# Altium PCB STM32RCT6_PCB.PcbDoc
Units mil, origin at the board's own origin, x right, y up, seen from the top; angles counter-clockwise.
Board outline 3159.64 x 2372.23 mil, 2 copper layers (Top Layer, Bottom Layer); 72 components, 72 nets, 327 pads, 137 vias.
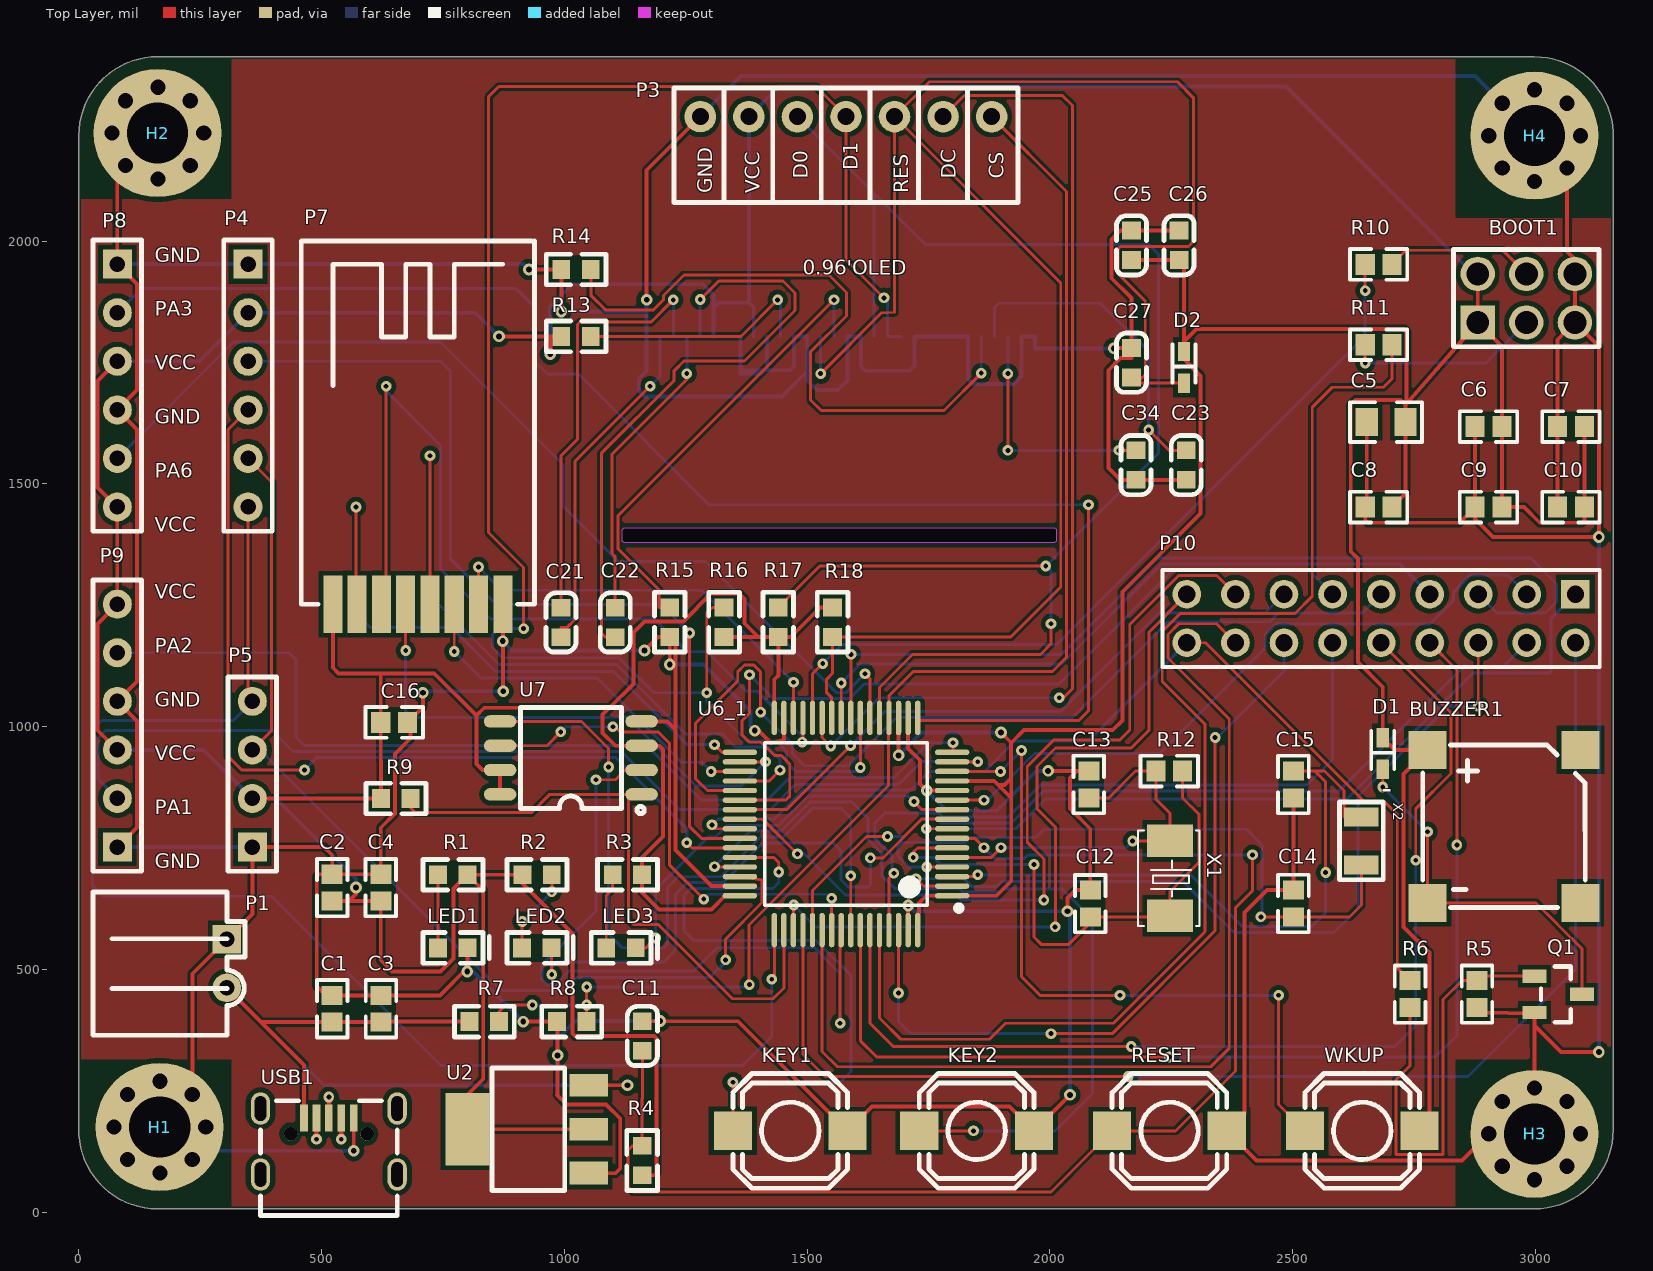
[diagram p0: Top Layer view]
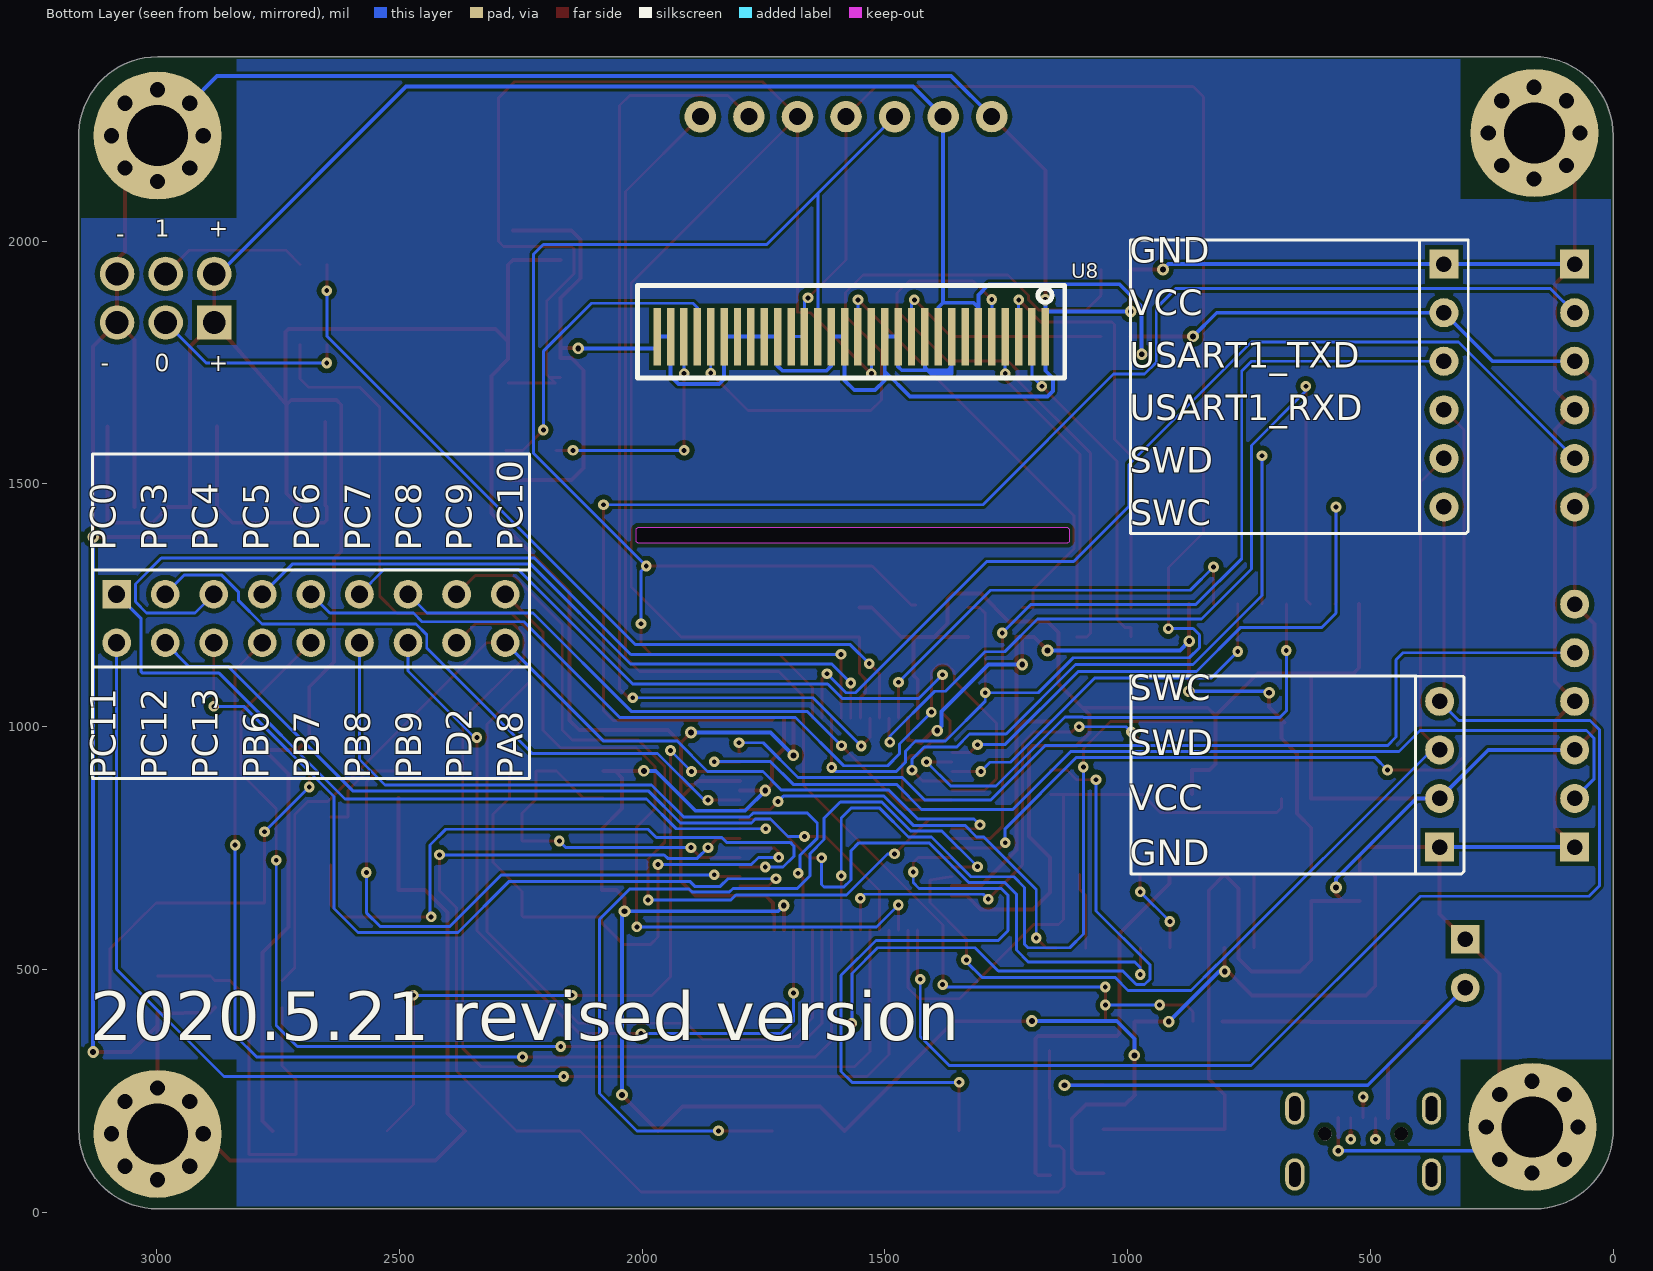
[diagram p1: Bottom Layer view, seen from below]

## Layer stack, top to bottom
Top Solder: solder mask 0.4, Solder Resist, Dk 3.5
Top Layer: signal copper 1.4
Dielectric 1: dielectric 12.6, FR-4, Dk 4.8
Bottom Layer: signal copper 1.4
Bottom Solder: solder mask 0.4, Solder Resist, Dk 3.5

## Board outline
0.46,160.1 cw(c5.2,161.74) 0.18,161.74 0.18,2216.83 cw(c5.2,2216.83) 0.18,2216.96 cw(c5.2,2217.09) 0.18,2217.09 cw(c162.93,2216.83) 163.19,2379.58 cw(c162.93,2216.83) 163.2,2379.58 2997.2,2379.58 cw(c2997.26,2217.03) 3159.69,2223.49 cw(c3154.8,2222.36) 3159.82,2222.36 3159.82,169.78 cw(c3154.8,169.78) 3159.82,169.78 cw(c2997.29,169.87) 2997.2,7.35 cw(c2997.2,12.36) 2997.17,7.35 162.68,7.35 cw(c162.44,169.61)
cut-out: 1119.37,1382.44 1119.37,1406.06 1123.31,1410 2009.25,1410 2013.07,1406.18 2013.07,1382.44 2009.13,1378.5 1123.31,1378.5

## Design rules (kind name [scope] priority, off if disabled: settings)
Clearance Clearance_stm32rct6 [All] p1: gap=10 ignorepadtopadclearanceinfootprint=TRUE except(0: Arc-Hole Track-Hole SMDPad-Hole THPad-Hole Via-Hole Fill-Hole Poly-Hole Region-Hole Text-Hole; 6: Arc-Arc Arc-Track Arc-SMDPad Arc-THPad Arc-Via Arc-Fill Arc-Poly Arc-Region Arc-Text Track-Track Track-SMDPad Track-THPad Track-Via Track-Fill Track-Poly Track-Region Track-Text)
Clearance Clearance_1 [All] p2: gap=10 ignorepadtopadclearanceinfootprint=FALSE except(0: Arc-Hole Track-Hole SMDPad-Hole THPad-Hole Via-Hole Fill-Hole Poly-Hole Region-Hole Text-Hole; 5: Arc-Arc Arc-Track Track-Track)
Clearance [All] p3: gap=10 ignorepadtopadclearanceinfootprint=FALSE except(0: Arc-Hole Track-Hole SMDPad-Hole THPad-Hole Via-Hole Fill-Hole Poly-Hole Region-Hole Text-Hole; 5: Arc-Arc Arc-Track Track-Track)
HoleToHoleClearance [All] p1: gap=5 allowstackedmicrovias=TRUE
MinimumSolderMaskSliver [All] p1: minsoldermaskwidth=5
PolygonConnect [All] p1: connectstyle=Relief reliefconductorwidth=10 reliefentries=4 polygonreliefangle="90 Angle" airgapwidth=10
RoutingVias "pwer via" [InNetClass('pwer')] p1: holewidth=12 width=24 viastyle="Through Hole" minholewidth=12 minwidth=24 maxholewidth=12 maxwidth=24
RoutingVias [All] p2: holewidth=10 width=22 viastyle="Through Hole" minholewidth=10 minwidth=22 maxholewidth=10 maxwidth=22
SilkToSolderMaskClearance [IsPad] p1: minsilkscreentomaskgap=5 clearancetoexposedcopper=TRUE
SolderMaskExpansion [All] p1: expansion=4
Width pwer [InNetClass('pwer')] p1: maxlimit=8 minlimit=8 preferedwidth=8
Width [InNetClass('All Nets')] p2: maxlimit=6 minlimit=6 preferedwidth=6
27 further rules are at their usual default settings.

## Classes and differential pairs
net class pwer: GND VBAT VCC3.3

## Components (designator, comment, footprint, x,y, rotation, side; value= is the part's Value field where it differs from the comment)
BOOT1 "HDR-IDC-2.54-2X3P" A2541WV-2X3P 2980.74,1882.36 r0 top
BUZZER1 "KLJ-8540-3627" BUZ-SMD_4P-L8.5-W8.5-TL 2934.89,794.83 r0 top
C1 "47uf" 0603 522.1,419.47 r270 top
C2 "47uf" 0603 522.1,668.81 r270 top
C3 "100nF" 0603 622.58,419.47 r270 top
C4 "100nF" 0603 622.1,668.81 r270 top
C5 "10uF" 0805 2692.23,1627.3 r0 top
C6 "100nF" 0603 2902.9,1618.06 r0 top
C7 "100nF" 0603 3072.76,1618.06 r0 top
C8 "100nF" 0603 2676.59,1452.36 r0 top
C9 "100nF" 0603 2902.9,1452.36 r0 top
C10 "100nF" 0603 3072.76,1452.36 r0 top
C11 "100nF/50V" 0603_C_JX 1160.72,363.4 r270 top
C12 "22pF" 0603 2083,636 r90 top
C13 "22pF" 0603 2079.92,881.06 r90 top
C14 "10pF" 0603 2501.2,636.09 r270 top
C15 "10pF" 0603 2501.2,881.06 r90 top
C16 "104" 0603 649.65,1009.03 r180 top
C21 "1uF/50V" 0603_C_JX 993.17,1214.76 r90 top
C22 "1uF/50V" 0603_C_JX 1104.93,1214.76 r270 top
C23 "4.7uF/16V" 0603_C_JX 2280.49,1538.74 r90 top
C25 "1uF/50V" 0603_C_JX 2167.81,1991.38 r90 top
C26 "1uF/50V" 0603_C_JX 2265.7,1991.38 r90 top
C27 "4.7uF/16V" 0603_C_JX 2167.81,1749.55 r90 top
C34 "2.2uF/50V" 0603_C_JX 2177.04,1538.74 r90 top
D1 "IN4148" SOD-523_JX 2685.2,952.3 r90 top
D2 "1N4148W" SOD-523_JX 2275.7,1747.63 r90 top
H1 "Hole" "PCBCOMPONENT_1 - DUPLICATE" 166.86,175.79 r0 top
H2 "Hole" "PCBCOMPONENT_1 - DUPLICATE" 162.68,2222.36 r0 top
H3 "Hole" "PCBCOMPONENT_1 - DUPLICATE" 2997.32,161.74 r0 top
H4 "Hole" "PCBCOMPONENT_1 - DUPLICATE" 2997.32,2217.09 r0 top
KEY1 "1TS009B-2500-4300" SW-SMD_L6.0-W6.0-P6.00-LS6.6 1465.2,167.92 r0 top
KEY2 "1TS009B-2500-4300" SW-SMD_L6.0-W6.0-P6.00-LS6.6 1849.03,167.92 r0 top
LED1 "Red/LED" 0603_D_JX 770.37,544.5 r180 top
LED2 "Green/LED" 0603_D_JX 943.55,544.5 r180 top
LED3 "Blue/LED" 0603_D_JX 1116.72,544.5 r180 top
P1 "XH_2501R_2P_JX" XH_2501R_2P_JX 305.2,512.36 r90 top
P3 "0.96OLED_7P_Module_JX" 0.96OLED_7P_MODULE_JX 1579.9,2256.46 r0 top
P4 "F_2.54_1*6P_JX" M_2.54_1*6P_JX 348.78,1702.52 r270 top
P5 "M_2.54_1*4P_JX" M_2.54_1*4P_JX 357.6,902.36 r90 top
P7 "2.4G_WIRELESS_MODULE_JX" WIRELM-SMD_DL-24N-2.4G 698.39,1252.36 r0 top
P8 "F_2.54_1*6P_JX" M_2.54_1*6P_JX 79.61,1002.36 r90 top
P9 "F_2.54_1*6P_JX" M_2.54_1*6P_JX 79.61,1702.52 r270 top
P10 "Header 9X2" HDR2X9 3081.8,1273 r180 top
Q1 "S8050" SOT-23-3_L2.9-W1.3-P1.90-LS2.4-BR 3046.55,449.14 r180 top
R1 "10K/1%" 0603_R_JX 770.5,695.49 r0 top
R2 "10K/1%" 0603_R_JX 944.05,695.27 r180 top
R3 "10K/1%" 0603_R_JX 1129.84,695.49 r0 top
R4 "10K/1%" 0603_R_JX 1160.11,106.74 r90 top
R5 "10K" 0603 2879.21,449.65 r90 top
R6 "10K" 0603 2741.42,449.65 r90 top
R7 "20K/1%" 0603_R_JX 835.2,393.01 r0 top
R8 "10K/1%" 0603_R_JX 1015.58,392.79 r180 top
R9 "4.7k" 0603_R_JX 653.09,852.47 r0 top
R10 "10K" 0603 2676.59,1951.93 r0 top
R11 "10K" 0603 2676.59,1786.55 r0 top
R12 "10K" 0603 2245.48,908.61 r0 top
R13 "4.7k/1%" 0603_R_JX 1024.17,1803.81 r0 top
R14 "910k/1%" 0603_R_JX 1024.17,1941.5 r0 top
R15 "4.7k/1%" 0603_R_JX 1217.07,1215.27 r90 top
R16 "4.7k/1%" 0603_R_JX 1328.82,1215.27 r90 top
R17 "4.7k/1%" 0603_R_JX 1440.58,1215.27 r90 top
R18 "4.7k/1%" 0603_R_JX 1552.33,1215.27 r90 top
RESET "1TS009B-2500-4300" SW-SMD_L6.0-W6.0-P6.00-LS6.6 2246.01,167.92 r0 top
U2 "AMS1117-3.3" SOT-223 925.2,171.3 r180 top
U6_1 "STM32F103RCT6TR" LQFP-64_10X10X05P 1580,799.76 r180 top
U7 "W25Q16JVSSIQ" W25Q16 1013.54,935.92 r90 top
U8 "0.96-OLED-30Pin" new_OLED30P 1169.57,1803.36 r0 bottom
USB1 "MICRO 4P DIP" MINI-USB-SMD_MICRO-4P-DIP 515.2,145.99 r0 top
WKUP "1TS009B-2500-4300" SW-SMD_L6.0-W6.0-P6.00-LS6.6 2642.99,167.92 r0 top
X1 "8MHz" SMD-5032_2P 2246.85,687.74 r270 top
X2 "32.768KHz" 32.768KHZ 2641.2,764.92 r270 top

## Footprints (in the part's own frame and the unit in brackets; to place one, negate y for a bottom-side part, rotate by r counter-clockwise, add the part's x,y. Pads: shape width x height; smd on the part's side, far side on the other; paste and mask are expansions set on the pad)
0.96OLED_7P_MODULE_JX [mm]
  round 1.65 hole 0.89: 1(-7.617,-0.003) 2(-5.077,-0.008) 3(-2.537,-0.008) 4(0.003,0) 5(2.54,-0.005) 6(5.08,-0.005) 7(7.62,-0.008)
  silkscreen extent -9,-4.5 9,1.5
32.768KHZ [mm]
  rect 1x1.8 smd: 1(-1.25,0) 2(1.25,0)
  silkscreen extent -2.03,-1.14 2.03,1.14
0603 [mm]
  rect 1x1.1 smd: 1(-0.7,0) 2(0.7,0)
  silkscreen extent -1.5,-0.8 1.5,0.8
0603_C_JX [mil]
  rect 36.61x38.58 smd: 1(-30.31,-0.21) 2(30.38,-0.01)
  silkscreen extent -61,-31 61,31
0603_D_JX [mil]
  rect 36.61x38.58 smd: 1(30.38,-0.01) 2(-30.31,-0.21)
  silkscreen extent -75,-32 61,31
0603_R_JX [mil]
  rect 36.61x38.58 smd: 1(-30.31,-0.11) 2(30.38,-0.11)
  silkscreen extent -62,-32 62,31
0805 [mm]
  rect 1.16x1.45 smd: 1(-1.016,0) 2(1.016,0)
  silkscreen extent -1.9,-1.03 1.87,1.04
A2541WV-2X3P [mm]
  rect 1.8x1.8 hole 1.2: 1(-2.54,-1.27)
  round 1.8 hole 1.2: 2(-2.54,1.27) 3(0,-1.27) 4(0,1.27) 5(2.54,-1.27) 6(2.54,1.27)
  silkscreen extent -3.81,-2.54 3.81,2.54
BUZ-SMD_4P-L8.5-W8.5-TL [mm]
  rect 2x2 smd: 1(-4,4) 2(-4,-4) 3(4,-4) 4(4,4)
  silkscreen extent -4.25,-4.25 4.25,4.25
HDR2X9 [mm] "Connector; Header; 9x2 Position"
  rect 1.5x1.5 hole 0.9: 1(0,0)
  round 1.5 hole 0.9: 2(0,2.54) 3(2.54,0) 4(2.54,2.54) 5(5.08,0) 6(5.08,2.54) 7(7.62,0) 8(7.62,2.54) 9(10.16,0) 10(10.16,2.54) 11(12.7,0) 12(12.7,2.54) 13(15.24,0) 14(15.24,2.54) 15(17.78,0) 16(17.78,2.54) 17(20.32,0) 18(20.32,2.54)
  silkscreen extent -1.27,-1.27 21.59,3.81
LQFP-64_10X10X05P [mil]
  oval 70.7x11.02 smd: 1(-218.5,147.64) 2(-218.5,127.95) 3(-218.5,108.27) 4(-218.5,88.58) 5(-218.5,68.9) 6(-218.5,49.21) 7(-218.5,29.53) 8(-218.5,9.84) 9(-218.5,-9.84) 10(-218.5,-29.53) 11(-218.5,-49.21) 12(-218.5,-68.9) 13(-218.5,-88.58) 14(-218.5,-108.27) 15(-218.5,-127.95) 16(-218.5,-147.64) 33(218.5,-147.64) 34(218.5,-127.95) 35(218.5,-108.27) 36(218.5,-88.58) 37(218.5,-68.9) 38(218.5,-49.21) 39(218.5,-29.53) 40(218.5,-9.84) 41(218.5,9.84) 42(218.5,29.53) 43(218.5,49.21) 44(218.5,68.9) 45(218.5,88.58) 46(218.5,108.27) 47(218.5,127.95) 48(218.5,147.64)
  oval 11.02x70.7 smd: 17(-147.64,-218.5) 18(-127.95,-218.5) 19(-108.27,-218.5) 20(-88.58,-218.5) 21(-68.9,-218.5) 22(-49.21,-218.5) 23(-29.53,-218.5) 24(-9.84,-218.5) 25(9.84,-218.5) 26(29.53,-218.5) 27(49.21,-218.5) 28(68.9,-218.5) 29(88.58,-218.5) 30(108.27,-218.5) 31(127.95,-218.5) 32(147.64,-218.5) 49(147.64,218.5) 50(127.95,218.5) 51(108.27,218.5) 52(88.58,218.5) 53(68.9,218.5) 54(49.21,218.5) 55(29.53,218.5) 56(9.84,218.5) 57(-9.84,218.5) 58(-29.53,218.5) 59(-49.21,218.5) 60(-68.9,218.5) 61(-88.58,218.5) 62(-108.27,218.5) 63(-127.95,218.5) 64(-147.64,218.5)
  silkscreen extent -238,-167 167,179
M_2.54_1*4P_JX [mm]
  rect 1.52x1.52 hole 0.81: 1(-3.81,0)
  round 1.52 hole 0.81: 2(-1.27,0) 3(1.27,0) 4(3.81,0)
  silkscreen extent -5.08,-1.27 5.08,1.27
M_2.54_1*6P_JX [mm]
  rect 1.52x1.52 hole 0.81: 1(-6.35,0)
  round 1.52 hole 0.81: 2(-3.81,0) 3(-1.27,0) 4(1.27,0) 5(3.81,0) 6(6.35,0)
  silkscreen extent -7.62,-1.27 7.62,1.27
MINI-USB-SMD_MICRO-4P-DIP [mm]
  rect 0.4x1.4 smd: 1(-1.3,1.225) 2(-0.65,1.225) 3(0,1.225) 4(0.65,1.225) 5(1.3,1.225)
  oval 1x1.699 hole 0.6 slot 1.3 at 90 deg: 6(-3.575,-1.725) 6(-3.575,1.725) 6(3.575,-1.725) 6(3.575,1.725)
  round 0.7 hole 0.7 unplated: ""(-2,0.4) ""(2,0.4)
  silkscreen extent -3.57,-3.87 3.57,2.14
new_OLED30P [mm]
  rect 0.39x3 smd: 1(0,0) 2(0.7,0) 3(1.4,0) 4(2.1,0) 5(2.8,0) 6(3.5,0) 7(4.2,0) 8(4.9,0) 9(5.6,0) 10(6.3,0) 11(7,0) 12(7.7,0) 13(8.4,0) 14(9.1,0) 15(9.8,0) 16(10.5,0) 17(11.2,0) 18(11.9,0) 19(12.6,0) 20(13.3,0) 21(14,0) 22(14.7,0) 23(15.4,0) 24(16.1,0) 25(16.8,0) 26(17.5,0) 27(18.2,0) 28(18.9,0) 29(19.6,0) 30(20.3,0)
  silkscreen extent -1.02,-2.67 21.34,2.16
"PCBCOMPONENT_1 - DUPLICATE" [mm]
  round 1.2 hole 0.8: 1(-2.387,0) 1(-1.684,-1.697) 1(-1.684,1.697) 1(0.013,-2.4) 1(0.013,2.4) 1(1.71,1.697) 1(1.71,-1.697) 1(2.413,0)
  round 6.7 hole 3.2: 1(0,0)
SMD-5032_2P [mil]
  rect 66.92x94.48 smd: 1(-77.18,0.02) 2(77.18,-0.02)
  silkscreen extent -99,-66 98,61
SOD-523_JX [mil]
  rect 40x25 smd: 1(25,0) 2(-40,0)
  silkscreen extent -39,-24 39,24
SOT-23-3_L2.9-W1.3-P1.90-LS2.4-BR [mm]
  rect 1.25x0.7 smd: 1(1.25,-0.95) 2(1.25,0.95) 3(-1.25,0)
  silkscreen extent -0.65,-1.46 0.9,1.46
SOT-223 [mm]
  rect 2x1.2 smd: 1(-3.175,2.3) 2(-3.175,0) 3(-3.175,-2.3)
  rect 2.3x3.8 smd: 4(3.175,0)
  silkscreen extent -1.93,-3.2 1.87,3.2
SW-SMD_L6.0-W6.0-P6.00-LS6.6 [mm]
  rect 2x2 smd: 1(-3,0) 2(3,0)
  silkscreen extent -3,-3 3,3
W25Q16 [mil]
  oval 25.59x66.86 smd: 1(-75,-145.67) 2(-25,-145.67) 3(25,-145.67) 4(75,-145.67) 5(75,145.67) 6(25,145.67) 7(-25,145.67) 8(-75,145.67)
  silkscreen extent -115,-151 104,104
WIRELM-SMD_DL-24N-2.4G [mm]
  rect 1x3 smd: 1(-4.445,0) 2(-3.175,0) 3(-1.905,0) 4(-0.635,0) 5(0.635,0) 6(1.905,0) 7(3.175,0) 8(4.445,0)
  silkscreen extent -6.1,0 6.1,19
XH_2501R_2P_JX [mm]
  rect 1.5x1.5 hole 0.81: 1(1.27,0)
  round 1.5 hole 0.81: 2(-1.27,0)
  silkscreen extent -3.75,-0.95 3.75,7

## Part data
BOOT1: BOM_Manufacturer=BOOMELE, BOM_Manufacturer Part="2X3 2.54mm IDC Box", BOM_Supplier=LCSC, BOM_Supplier Part=C11214, image=//image.lceda.cn/szlcsc/C11214.jpg, spicePre=P
BUZZER1: BOM_Manufacturer=KELIKING, BOM_Manufacturer Part=KLJ-8540-3627, BOM_Supplier=LCSC, BOM_Supplier Part=C189207, Contributor=LCSC, spicePre=B, spiceSymbolName=KLJ-8540-3627
C1 C2: library part 100nF, BOM_Manufacturer=WTC, BOM_Manufacturer Part=0603B104K500, BOM_Supplier=LCSC, BOM_Supplier Part=C90807, nameAlias=Capacitance, spicePre=C, spiceSymbolName=0603B104K500
C3 C4 C6 C7 C8 C9 C10: BOM_Manufacturer=WTC, BOM_Manufacturer Part=0603B104K500, BOM_Supplier=LCSC, BOM_Supplier Part=C90807, nameAlias=Capacitance, spicePre=C, spiceSymbolName=0603B104K500
C5: BOM_Manufacturer=FH, BOM_Manufacturer Part=0805F106M250NT, BOM_Supplier=LCSC, BOM_Supplier Part=C48181, nameAlias=Capacitance, spicePre=C, spiceSymbolName=0805F106M250NT
C12 C13: BOM_Manufacturer=WTC, BOM_Manufacturer Part=0603N220G500, BOM_Supplier=LCSC, BOM_Supplier Part=C152916, Contributor=LCSC, nameAlias=Capacitance, spicePre=C, spiceSymbolName=0603N220G500
C14 C15 C16: library part 22pF, BOM_Manufacturer=WTC, BOM_Manufacturer Part=0603N220G500, BOM_Supplier=LCSC, BOM_Supplier Part=C152916, Contributor=LCSC, nameAlias=Capacitance, spicePre=C, spiceSymbolName=0603N220G500
D1: BOM_Manufacturer=Semtech, BOM_Manufacturer Part=IN4148, BOM_Supplier=LCSC, BOM_Supplier Part=C14538, Contributor=LCSC, spicePre=D, spiceSymbolName=IN4148
D2: BOM_LCSC Assembly=Yes, BOM_Manufacturer=SEMTECH, BOM_Manufacturer Part=1N4148W, BOM_Supplier=LCSC, BOM_Supplier Part=C81598, image=//image.lceda.cn/szlcsc/C81598.jpg, SMT Type=Basic, spicePre=D
KEY1 KEY2 RESET WKUP: BOM_Manufacturer=HYP, BOM_Manufacturer Part=1TS009B-2500-4300, BOM_Supplier=LCSC, BOM_Supplier Part=C255815, Contributor=LCSC, spicePre=S, spiceSymbolName=1TS009B-2500-4300
P10: "Header, 9-Pin, Dual row", LatestRevisionDate=17-Jul-2002, LatestRevisionNote="Re-released for DXP Platform.", Publisher="Altium Limited"
Q1: library part S8550_C2147, BOM_LCSC Assembly=Yes, BOM_Manufacturer=CJ, BOM_Manufacturer Part=S8550, BOM_Supplier=LCSC, BOM_Supplier Part=C2147, image=//image.lceda.cn/szlcsc/C2147.jpg, SMT Type=Extend, spicePre=Q, spiceSymbolName=S8550_C2147
R5 R6 R10 R11 R12: BOM_Manufacturer=ROHM, BOM_Manufacturer Part=MCR03EZPFX1002, BOM_Supplier=LCSC, BOM_Supplier Part=C114853, nameAlias="Resistance (Ohms)", spicePre=R, spiceSymbolName=MCR03EZPFX1002
R9: library part 10K/1%, BOM_Supplier=LCSC, nameAlias=Value(Ω), spicePre=R, spiceSymbolName=Resistor
U2: BOM_LCSC Assembly=Yes, BOM_Manufacturer=AMS, BOM_Manufacturer Part=AMS1117-3.3, BOM_Supplier=LCSC, BOM_Supplier Part=C6186, image=//image.lceda.cn/szlcsc/C6186.jpg, sourceId=dwIGgezVh, spicePre=U, timeStamp=1476261164
U6_1: library part STM32F103RCT6TR_1, BOM_LCSC Assembly=Yes, BOM_Manufacturer=STMicroelectronics, BOM_Manufacturer Part=STM32F103RCT6TR, BOM_Supplier=LCSC, BOM_Supplier Part=C39704, image=//image.lceda.cn/szlcsc/C39704.jpg, spicePre=U
U7: BOM_LCSC Assembly=Yes, BOM_Manufacturer=WINBOND, BOM_Manufacturer Part=W25Q16JVSSIQ, BOM_Supplier=LCSC, BOM_Supplier Part=C82317, image=//image.lceda.cn/szlcsc/C82317.jpg, SMT Type=Extend, spicePre=U, spiceSymbolName=W25Q16JVSSIQ
U8: library part 0.96-OLED-30Pin_JX-周利杰, Contributor=2019µç×, spicePre=U
USB1: BOM_Manufacturer="SHOU HAN", BOM_Manufacturer Part="MICRO 4P DIP", BOM_Supplier=LCSC, BOM_Supplier Part=C456008, Contributor=LCSC, spicePre=U, spiceSymbolName="MICRO 4P DIP"
X1: BOM_Manufacturer="TXC Corp", BOM_Manufacturer Part=AA08000004, BOM_Supplier=LCSC, BOM_Supplier Part=C337214, Contributor=LCSC, nameAlias=Value, spicePre=X, spiceSymbolName=AA08000004
X2: BOM_Manufacturer=EPSON, BOM_Manufacturer Part=FC-135R32.768kHz7.0pF20PPM, BOM_Supplier=LCSC, BOM_Supplier Part=C94674, nameAlias=Frequency, spicePre=X, spiceSymbolName=FC-135R32.768kHz7.0pF20PPM
C11: BOM_Supplier=LCSC, nameAlias=Value(F), spicePre=C, spiceSymbolName=Capacitor
C21 C22 C23 C25 C26 C27 C34: nameAlias=Value(F), spicePre=C, spiceSymbolName=Cap_RAD-0.1_EU
H1 H2 H3 H4: Contributor=lc_ms, spicePre=H, spiceSymbolName=Hole
LED1 LED2 LED3: BOM_Supplier=LCSC, spicePre=L
P1: BOM_Supplier=LCSC, catid=20, spicePre=P
P3: BOM_Supplier=技?, spicePre=P
P4 P5 P8 P9: BOM_Supplier=LCSC, spicePre=P
P7: BOM_Supplier=技?, sourceId=LXR9rJ0Uc, spicePre=P, timeStamp=1459465771
R1 R2 R3 R4 R7 R8: BOM_Supplier=LCSC, nameAlias=Value(Ω), spicePre=R, spiceSymbolName=Resistor
R13 R14 R15 R16 R17 R18: nameAlias=Value(Ω), spicePre=R, spiceSymbolName=Res_AXIAL-0.3(1/8W)_EU

## Via types
v1: diameter 22, hole 10, Top Layer to Bottom Layer, tented both sides, 109 vias
v2: diameter 24, hole 12, Top Layer to Bottom Layer, tented both sides, 28 vias

## Nets (pads, with @x,y where several pads share a name; then routed paths per layer and width w, separated by ;. In a path a pad name is that pad's centre, name@x,y a point inside that pad or via, vN(x,y) a via of type N, cw(c..) or ccw(c..) an arc to the next point about the centre after c; other vN are vias at no path point)
BOOT0: R11.2 U6_1.60 | length 2602.2
  Top Layer w6: U6_1.60 1648.9,400.3 1692.59,356.61 1875.52,356.61 1908.38,389.47 2130.63,389.47 2319.2,578.04 2319.2,1005.33 2231.2,1093.33 2231.2,1196.04 2268.2,1233.04 2504.2,1233.04 2540,1268.84 2540,1658.04 2581,1699.04 2686.82,1699.04 2704.15,1716.37 R11.2
BOOT1: R10.1 U6_1.28 | length 1664.1
  Top Layer w6: U6_1.28 1511.1,1108.94 v1(1532.2,1130.04) ; v1(2649.03,1898.04) R10.1
  Bottom Layer w6: v1(1532.2,1130.04) 1571.2,1169.04 2013.53,1169.04 2649.03,1804.54 v1(2649.03,1898.04)
Buzzer: P10.18 R6.2 U6_1.41 | length 2126.3
  Top Layer w6: v1(1304.2,798.04) 1312.31,789.92 U6_1.41 ; P10.18 2320.23,1173 2647.2,846.04 2688.2,846.04 2715.04,819.19 2715.04,503.59 R6.2
  Bottom Layer w6: v1(1304.2,798.04) 1316.2,810.04 1432.2,810.04 1491.56,869.41 1712.56,869.41 1751.2,908.04 1865.2,908.04 1928.2,971.04 2079.84,971.04 P10.18
CE: P7.2 U6_1.33 | length 1328.4
  Top Layer w6: v1(571.2,1452.36) 571.2,1254.55 P7.2 ; v1(1309.2,963.04) 1324.83,947.4 U6_1.33
  Bottom Layer w6: v1(571.2,1452.36) 571.2,1233.85 601.01,1204.04 768.2,1204.04 858.2,1114.04 1101.94,1114.04 1252.94,963.04 v1(1309.2,963.04)
CS#(SPI1_CS): P3.7 R7.2 R8.1 U6_1.20 | length 2904.9
  Top Layer w6: R7.2 865.58,413.04 879.58,427.04 v1(934.2,427.04) ; R8.1 v1(1045.89,427.04) 1045.89,463.73 v1(1046.2,464.04) ; v1(1381.11,469.04) 1380,470.15 1380,591.84 1667.27,879.11 1667.27,1016.95 U6_1.20 1668.58,1064.04 1718.58,1114.04 2005.2,1114.04 2034.2,1143.04 2034.2,2101.86 P3.7
  Bottom Layer w6: v1(934.2,427.04) v1(1045.89,427.04) ; v1(1046.2,464.04) 1376.11,464.04 v1(1381.11,469.04)
CSN: P7.3 U6_1.29 | length 1825.2
  Top Layer w6: P7.3 633.16,1262.13 v1(633.16,1701.04) ; v1(1489.63,968.36) 1491.42,970.15 U6_1.29
  Bottom Layer w6: v1(633.16,1701.04) 633.16,1691.27 745.2,1579.23 745.2,1325.04 848.2,1222.04 1185.62,1222.04 1253.2,1154.46 1293.88,1154.46 1375.2,1073.14 1397.27,1073.14 1489.63,980.78 v1(1489.63,968.36)
D0(SPI1_SCK): P3.3 R17.2 U6_1.21 U8.18 | length 3099.7
  Top Layer w6: R17.2@1436.07,1250.27 1445.31,1250.27 1526.07,1331.04 v1(1991.2,1331.04) ; U6_1.21 1648.9,1081.04 1716.9,1149.04 1980.33,1149.04 2002.02,1170.73 v1(2002.02,1212.04)
  Bottom Layer w6: P3.3 1638.08,2098.08 ; U8.18 1638.08,2098.08 ; v1(2002.02,1212.04) 2002.02,1320.21 v1(1991.2,1331.04) 2223.2,1563.04 2223.2,1973.04 2203.2,1993.04 1743.12,1993.04 1638.08,2098.08
D1(SPI1_MOSI): P3.4 R16.2 U6_1.23 U8.19 U8.20 | length 3702.9
  Top Layer w6: v1(916.2,1202.04) 916.2,1328.04 844.2,1400.04 844.2,2297.04 865.2,2318.04 1518.42,2318.04 P3.4 1580,1961.23 v1(1658.2,1883.04) ; v1(1293.2,1070.04) 1293.2,1233.65 1305.2,1245.65 R16.2 ; v1(1609.53,916.04) U6_1.23
  Bottom Layer w6: v1(916.2,1202.04) 865.2,1202.04 852.38,1189.23 852.38,1162.85 873.2,1142.04 1112.2,1142.04 1184.2,1070.04 v1(1293.2,1070.04) 1293.2,1052.6 1375.2,970.6 1436.73,970.6 1457.63,949.7 1457.63,926.76 1476.62,907.77 1601.26,907.77 v1(1609.53,916.04) ; v1(1658.2,1883.04) 1665.63,1875.6 U8.19 U8.20
D/C#: P3.6 U6_1.27 | length 2105.8
  Top Layer w6: U6_1.27 1530.79,978.15 v1(1548.61,960.32) ; P3.6 1823.68,2300.04 2025.2,2300.04 2046.2,2279.04 2046.2,1078.07 2027.89,1059.76 v1(2019.2,1059.76)
  Bottom Layer w6: v1(1548.61,960.32) 1648.06,1059.76 v1(2019.2,1059.76)
FLASH_CS: R9.2 U6_1.50 U7.1 | length 1288.3
  Top Layer w6: R9.2 683.47,833.04 693.47,823.04 932.2,823.04 970.08,860.92 U7.1@1132.2,860.92 ; U7.1 U7.1@1132.2,860.92 ; U6_1.50 1452.05,462.35 1429.7,440 1346.41,440 1193.37,593.04 1142.2,593.04 1132.2,603.04 U7.1@1132.2,860.92
GND: BOOT1.5 BOOT1.6 C1.1 C2.1 C3.1 C4.1 C5.1 C6.1 C7.1 C8.1 C9.1 C10.1 C11.1 C12.2 C13.2 C14.1 C15.1 C16.1 C23.1 C25.2 C26.2 C27.2 C34.1 H1.1 H2.1 H3.1 H4.1 KEY1.2 KEY2.2 LED1.2 P1.1 P3.1 P4.1 P5.1 P7.8 P8.1 P8.4 P9.1 P9.4 Q1.2 R5.1 R8.2 R14.1 R15.1 RESET.2 U2.1 U6_1.12 U6_1.18 U6_1.31 U6_1.47 U6_1.63 U7.4 U8.1 U8.8 U8.10 U8.12 U8.13 U8.16 U8.17 U8.21 U8.22 U8.23 U8.24 U8.25 U8.29 U8.30 USB1.5 | length 23544.2
  Top Layer w8: H1.1@72.88,175.79 100.56,203.47 H1.1@100.56,242.61 ; P8.1 120.2,792.95 120.2,1011.77 P8.4 120.2,1092.95 120.2,1611.93 P9.4 120.2,1693.11 120.2,1911.93 P9.1 79.61,2138.78 96.38,2155.55 96.38,2183.22 68.7,2183.22 68.7,2222.36 96.38,2250.04 H2.1@96.38,2289.18 ; H2.1@230,2155.55 257.68,2183.22 H2.1@257.68,2222.36 ; H1.1@234.19,108.98 261.86,136.65 261.86,175.79 234.18,203.47 234.18,242.61 234.18,491.35 P1.1 357.6,614.77 P5.1 505.2,752.36 522.1,735.46 C2.1 ; v2(566.38,127.04) USB1.5 ; C16.1 C16.1@683.47,1015.29 ; v2(708.71,1070.04) 708.71,1040.53 C16.1@683.47,1015.29 ; v2(800.2,496.04) v2@800.68,503.85 ; LED1.2 v2@800.68,503.85 ; P7.8 v2(873.39,1176.31) 873.39,1066.23 874.2,1067.04 v2(874.2,1073.14) ; v2(915.33,392.9) R8.2 986.2,391.9 v2(986.2,323.4) 986.2,243.04 985.2,242.04 1005.2,222.04 1086.2,222.04 1115.2,193.04 1115.2,90.75 1105.2,80.75 U2.1 ; v2(927.2,1941.39) R14.1 v2(993.86,1855.04) ; U7.4 1212.08,1010.92 1229.2,993.81 ; C11.1 v2@1196.87,393.71 ; v2(1165.2,1157.04) 1193.12,1184.96 R15.1 ; v2(1169.57,1879.04) 1169.57,2145.93 P3.1 ; v2(1197.2,394.04) v2@1196.87,393.71 ; v2(1217.18,1128.04) R15.1 ; U6_1.47 1303.42,671.81 1229.2,746.04 1229.2,993.81 ; v2(1392.2,992.04) 1399.58,992.04 1425.36,966.26 1452.05,973.04 U6_1.31 ; U6_1.63 1707.95,631.79 v2(1708.2,632.04) ; U6_1.18 1707.95,955.36 1732.32,930.98 1732.32,882.49 v2(1746.15,868.66) U6_1.12 ; v2(1996.2,909.2) 1996.77,908.62 2055.2,908.62 ; v2(2036.2,620.04) 2036.2,647.04 2052.72,663.56 C12.2 2083,790.04 2041.26,831.78 2041.26,894.69 2055.2,908.62 ; v2(2041.26,242.04) KEY2.2 1917.02,218.04 1633.43,218.04 KEY1.2 1357.51,393.71 v2@1196.87,393.71 ; C13.2 2055.2,908.62 ; v2(2131.2,1779.04) 2132.09,1779.93 C27.2 ; C26.2 C25.2 2145.2,2021.76 2126.73,2003.29 2126.73,1923.5 2167.82,1882.41 C27.2 ; C23.1 C34.1 2144.81,1508.43 2120.2,1533.04 2120.2,1734.04 2145.2,1759.04 2167.82,1759.04 C27.2 ; C15.1 C14.1 2446.53,663.65 2400.2,617.32 2400.2,203.99 RESET.2 2425.49,106.55 2848.15,106.55 H3.1@2903.35,161.74 ; C5.1 2652.23,1455.56 C8.1 2649.03,1426.2 2655.2,1420.04 2843.02,1420.04 C9.1 ; C6.1 C9.1 ; R5.1 2889.57,411.74 2997.3,409.37 Q1.2@2997.35,409.37 ; H3.1@2931.02,94.93 2903.35,122.6 H3.1@2903.35,161.74 ; H3.1@2931.02,228.56 2931.02,189.42 H3.1@2903.35,161.74 ; H4.1@2931.02,2150.27 2903.35,2177.95 2903.35,2217.09 2931.02,2244.76 H4.1@2931.02,2283.9 ; Q1.2 Q1.2@2997.35,409.37 ; H3.1@2997.84,256.23 2997.35,356.89 2997.35,384.97 ; C10.1 C7.1 3045.2,1796.82 BOOT1.5 ; H3.1@3064.65,94.93 3092.33,122.61 H3.1@3092.33,161.74 ; H4.1@3092.33,2217.09 3092.33,2177.95 3064.65,2150.27 3064.65,1978.58 3080.74,1962.49 BOOT1.6 BOOT1.5 ; v2(3130.2,330.2) 3052.12,330.2 2997.35,384.97 ; C2.1 495.2,696.37 490.2,691.37 490.2,466.04 509.2,447.03 C1.1 C3.1 743.86,447.03 v2@800.68,503.85 ; C2.1 C4.1 622.1,792.04 651.2,821.13 651.2,944.02 683.47,976.3 C16.1@683.47,1015.29 ; R15.1 1229.2,1184.96 1229.2,993.81 ; C9.1 2875.34,1427.89 2912.47,1390.76 v2(3130.2,1390.76) 3130.2,1782.91 BOOT1.5 ; 2997.35,384.97 Q1.2@2997.35,409.37
  Bottom Layer w8: H2.1@68.7,2222.36 H2.1@162.68,2222.36 ; H1.1@72.88,175.79 H1.1@166.86,175.79 ; P8.1 218.2,752.36 ; P9.1 P4.1 916.06,1952.52 v2(927.2,1941.39) ; H2.1@96.38,2155.55 135.52,2155.55 163.19,2127.87 190.86,2155.55 H2.1@230,2155.55 ; H2.1@96.38,2289.18 124.05,2316.85 163.19,2316.85 190.86,2289.18 H2.1@230,2289.18 ; H1.1@100.56,108.98 128.23,81.31 167.37,81.31 195.05,108.98 234.19,108.98 252.24,127.04 v2(566.38,127.04) ; H1.1@100.56,242.61 139.7,242.61 167.37,270.28 206.51,270.28 H1.1@234.18,242.61 ; 218.2,752.36 P5.1 ; v2(708.71,1070.04) 711.81,1073.14 v2(874.2,1073.14) ; v2(800.2,496.04) 812.2,496.04 v2(915.33,392.9) ; v2(873.39,1176.31) 892.66,1157.04 v2(1165.2,1157.04) ; v2(986.2,323.4) 986.2,357.61 1022.63,394.04 v2(1197.2,394.04) ; v2(993.86,1855.04) U8.1@1169.57,1855.04 ; v2(1169.57,1879.04) U8.1@1169.57,1855.04 ; v2(1217.18,1128.04) 1286.2,1128.04 1383.2,1031.04 1383.2,1001.04 v2(1392.2,992.04) ; P3.1 1363.64,2340 2874.92,2340 2931.02,2283.9 2970.16,2283.9 2997.84,2311.57 3036.98,2311.57 H4.1@3064.65,2283.9 ; U8.8 1362.48,1741.75 ; U8.10 1417.6,1739.44 1412.2,1734.04 ; v2(1708.2,632.04) 1720.2,620.04 v2(2036.2,620.04) 2041.26,614.97 v2(2041.26,242.04) ; v2(1746.15,868.66) 1787.78,827.04 1889.51,827.04 1971.67,909.2 v2(1996.2,909.2) ; v2(2131.2,1779.04) 1968.78,1779.04 U8.30 U8.29 1941.23,1722.07 1925.2,1706.04 1840.99,1706.04 1830.99,1716.04 U8.25 U8.24 U8.23 U8.22 U8.21 1720.75,1743.04 1710.75,1733.04 1620.52,1733.04 1610.52,1743.04 U8.17 U8.16 1582.96,1713.04 1562.96,1693.04 1520.28,1693.04 1500.28,1713.04 1500.28,1732.04 ; H3.1@2903.35,161.74 H3.1@2997.32,161.74 ; H4.1@2903.35,2217.09 H4.1@2997.32,2217.09 ; H3.1@2931.02,94.93 2958.7,67.26 2997.84,67.26 3025.51,94.93 H3.1@3064.65,94.93 ; H3.1@2931.02,228.56 2970.16,228.56 2997.84,256.23 3025.51,228.56 H3.1@3064.65,228.56 ; H4.1@2931.02,2150.27 2970.16,2150.27 2997.84,2122.6 3025.51,2150.27 H4.1@3064.65,2150.27 ; v2(3130.2,330.2) v2(3130.2,1390.76) ; U8.1@1169.57,1855.04 U8.1 1169.57,1733.04 1154.13,1717.6 1154.13,1691.1 1165.2,1680.04 1448.28,1680.04 1500.28,1732.04 ; 1362.48,1741.75 1362.48,1727.31 1362.75,1727.04 1405.2,1727.04 1412.2,1734.04 ; 1362.48,1741.75 1370.2,1734.04 1412.2,1734.04 ; 1412.2,1734.04 1465.2,1734.04 1472.72,1741.56 U8.12 U8.13 1500.28,1732.04
IRQ: P7.7 U6_1.30 | length 896.6
  Top Layer w6: P7.7 v1(823.39,1329.04) ; U6_1.30 v1(1471.73,1091.5)
  Bottom Layer w6: v1(823.39,1329.04) 871.39,1281.04 1282.2,1281.04 v1(1471.73,1091.5)
KEY_1: KEY1.1 U6_1.44 | length 1337.1
  Top Layer w6: KEY1.1 v1(1347.09,267.93) ; U6_1.44 1431.25,730.86 1441.46,720.66 v1(1441.46,701.1)
  Bottom Layer w6: v1(1347.09,267.93) 1567.93,267.93 1590.2,290.2 1590.2,488.24 1518.44,560 1266.37,560 1246.2,580.17 1246.2,653.04 1260.34,667.18 1429.46,667.18 1441.46,679.18 v1(1441.46,701.1)
KEY_2: KEY2.1 U6_1.45 | length 1791.4
  Top Layer w6: v1(1309.2,712.04) 1310.05,711.18 U6_1.45 ; KEY2.1 v1(1842.47,167.92)
  Bottom Layer w6: v1(1309.2,712.04) 1382.2,785.04 1446.43,785.04 1506.43,845.04 1591.69,845.04 1625.2,811.53 1625.2,767.65 1654.2,738.65 1654.2,693.04 1680.2,667.04 1812.65,667.04 1820.2,659.49 1896.65,659.49 1903.2,666.04 2025.2,666.04 2087.79,603.45 2087.79,245.12 2010.58,167.92 v1(1842.47,167.92)
LED_BLUE: LED3.2 U6_1.10 | length 850.9
  Top Layer w6: LED3.2 1167.87,544.71 v1(1188.2,565.04) ; v1(1720,846.04) 1736.74,829.29 U6_1.10
  Bottom Layer w6: v1(1188.2,565.04) 1188.2,665.04 1296.2,773.04 1311.2,773.04 1335.2,797.04 1441.46,797.04 1501.46,857.04 1709,857.04 v1(1720,846.04)
LED_GREEN: LED2.2 U6_1.9 | length 1230.3
  Top Layer w6: LED2.2 973.86,490.38 v1(974.2,490.04) ; v1(1630.2,730.04) 1656.02,730.04 1736.02,810.04 1767.76,810.04 1768.2,809.6 U6_1.9
  Bottom Layer w6: v1(974.2,490.04) 974.2,504.04 986.2,516.04 1205.2,516.04 1229.2,540.04 1229.2,655.18 1253.2,679.18 1327.31,679.18 1409.17,761.04 1553.62,761.04 1569.84,744.82 1569.84,684.75 1584.56,670.04 1625.2,670.04 1630.2,675.04 v1(1630.2,730.04)
NetBOOT1_3: BOOT1.3 R11.1 | length 403.6
  Top Layer w6: R11.1 2649.03,1749.2 v1(2649.2,1749.04)
  Bottom Layer w6: v1(2649.2,1749.04) 2897.42,1749.04 BOOT1.3
NetBOOT1_4: BOOT1.4 R10.2 | length 308.8
  Top Layer w6: R10.2 2733.26,1981.04 2932.07,1981.04 BOOT1.4
NetBUZZER1_2: BUZZER1.2 D1.2 Q1.3 | length 764.2
  Top Layer w6: v1(2685.2,876.04) D1.2 ; v1(2777.41,783.82) BUZZER1.2 3000.93,637.34 3044,594.27 ; 3044,594.25 3049.27,588.97 3095.75,542.52 Q1.3
  Bottom Layer w6: v1(2685.2,876.04) v1(2777.41,783.82)
NetC12_1: C12.1 R12.2 U6_1.6 X1.2 | length 1152.7
  Top Layer w6: v1(1718.58,731.04) 1718.58,742.07 1727.06,750.55 U6_1.6 ; v1(1967.2,716.22) 1967.2,567.04 1982.2,552.04 2038.5,552.04 2083,596.54 C12.1 2244.7,608.44 X1.2 2246.83,661.05 2307.2,721.42 2307.2,819.04 2273.04,853.19 R12.2
  Bottom Layer w6: v1(1718.58,731.04) 1760.15,731.04 1774.96,716.22 v1(1967.2,716.22)
NetC13_1: C13.1 R12.1 U6_1.5 X1.1 | length 779
  Top Layer w6: U6_1.5 1879.02,730.86 v1(1899.2,751.04) ; C13.1 2121.2,853.5 2176.31,908.61 R12.1 2217.92,850.98 2246.87,822.04 X1.1 v1(2170.2,764.92)
  Bottom Layer w6: v1(1899.2,751.04) 2156.31,751.04 v1(2170.2,764.92)
NetC21_1: C21.1 U8.2 | length 710.2
  Top Layer w6: C21.1 993.38,1204.04 1005.2,1204.04 1022.2,1221.04 1022.2,1546.5 v1(1176.73,1701.04)
  Bottom Layer w6: v1(1176.73,1701.04) 1197.13,1721.44 U8.2
NetC21_2: C21.2 U8.3 | length 891
  Top Layer w6: C21.2 993.18,1558.03 1027.2,1592.04 1027.2,1828.04 1032.2,1833.04 1178.2,1833.04 v1(1224.2,1879.04)
  Bottom Layer w6: v1(1224.2,1879.04) 1224.69,1878.55 U8.3
NetC22_1: C22.1 U8.4 | length 624.8
  Top Layer w6: C22.1 1104.72,1350.04 1098.2,1356.56 1098.2,1561.04 1252.2,1715.04 v1(1252.2,1727.04)
  Bottom Layer w6: v1(1252.2,1727.04) 1252.25,1727.09 U8.4
NetC22_2: C22.2 U8.5 | length 1268.7
  Top Layer w6: C22.2 1084.85,1184.38 1076.2,1193.04 1076.2,1563.04 1226.2,1713.04 1226.2,1733.04 1246.2,1753.04 1371.2,1753.04 1475.2,1857.04 1475.2,1893.04 1450.2,1918.04 1318.2,1918.04 v1(1279.81,1879.65)
  Bottom Layer w6: U8.5 v1(1279.81,1879.65)
NetC23_2: C23.2 U8.27 | length 678.1
  Top Layer w6: v1(2203.2,1611.19) 2245.27,1569.12 C23.2
  Bottom Layer w6: U8.27 1886.11,1863.04 1895.11,1872.04 2104.2,1872.04 2203.2,1773.04 v1(2203.2,1611.19)
NetC34_2: C34.2 U8.28 | length 498.4
  Top Layer w6: v1(1913.2,1569.04) v1(1913.2,1727.04) ; v1(2142.2,1569.04) 2142.27,1569.12 C34.2
  Bottom Layer w6: v1(1913.2,1569.04) v1(2142.2,1569.04) ; v1(1913.2,1727.04) 1913.67,1727.51 U8.28
NetLED1_1: LED1.1 R1.1 | length 151
  Top Layer w6: LED1.1 739.99,619.04 740.19,619.24 R1.1
NetLED2_1: LED2.1 R2.1 | length 176.2
  Top Layer w6: LED2.1 v1(913.17,599.01) ; v1(974.2,660.04) 974.36,660.2 R2.1
  Bottom Layer w6: v1(913.17,599.01) v1(974.2,660.04)
NetLED3_1: LED3.1 R3.1 | length 156.3
  Top Layer w6: LED3.1 1086.34,652.69 1099.53,665.88 R3.1
NetQ1_1: Q1.1 R5.2 R6.1 | length 937.9
  Top Layer w6: R6.1 2741.42,302.04 2712.73,273.35 2712.73,119.55 2809.47,119.55 2809.47,438.49 2848.2,477.21 R5.2 2888.54,486.54 Q1.1
NetR13_2: R13.2 U8.11 | length 494
  Top Layer w6: R13.2 1363.86,1803.7 v1(1439.2,1879.04)
  Bottom Layer w6: v1(1439.2,1879.04) 1445.16,1873.07 U8.11
NetR14_2: R14.2 U8.26 | length 1361.4
  Top Layer w6: R14.2 1054.55,1888.68 1085.2,1858.04 1183.2,1858.04 1204.2,1879.04 1204.2,1888.04 1246.2,1930.04 1545.2,1930.04 1581.2,1894.04 1581.2,1846.04 1507.2,1772.04 1507.2,1673.04 1529.2,1651.04 1781.55,1651.04 v1(1858.55,1728.04)
  Bottom Layer w6: v1(1858.55,1728.04) U8.26
NetR15_2: R15.2 U8.15 | length 950.7
  Top Layer w6: R15.2 1195.2,1245.65 1195.2,1282.04 1110.2,1367.04 1110.2,1434.04 v1(1555.2,1879.04)
  Bottom Layer w6: v1(1555.2,1879.04) 1555.4,1878.84 U8.15
OSC32_IN: C15.2 U6_1.3 X2.1 | length 1338.4
  Top Layer w6: U6_1.3 1847.56,691.49 v1(1851.2,695.13) ; C15.2 2545.2,908.62 ; v1(2567.64,699.92) 2567.64,886.18 2545.2,908.62 ; X2.1 2605.2,814.14 2605.2,868.62 2565.2,908.62 2545.2,908.62
  Bottom Layer w6: v1(1851.2,695.13) 2289.1,695.13 2395.7,588.53 2538.94,588.53 2567.64,617.23 v1(2567.64,699.92)
OSC32_OUT: C14.2 U6_1.4 X2.2 | length 1368
  Top Layer w6: v1(1746.2,711.04) 1746.34,711.18 U6_1.4 ; v1(2434.2,608.53) C14.2 2616.69,608.53 2641.2,633.04 X2.2
  Bottom Layer w6: v1(1746.2,711.04) 1709.46,711.04 1687.07,733.43 1687.07,754.14 1694.94,762.02 1825.86,762.02 1835.89,772.04 1970.59,772.04 1987.59,789.04 2404.29,789.04 2436.81,756.51 2436.81,611.15 v1(2434.2,608.53)
PA1: P8.2 U6_1.15 | length 2118.8
  Top Layer w6: U6_1.15 1850.87,927.71 v1(1851.2,928.04)
  Bottom Layer w6: P8.2 40.2,891.77 40.2,977.04 55.2,992.04 398.2,992.04 441.2,949.04 1117.43,949.04 1236.55,829.92 1424.71,829.92 1476.2,881.41 1688.56,881.41 1735.19,928.04 v1(1851.2,928.04)
PA2: P8.5 U6_1.16 | length 2009.9
  Top Layer w6: U6_1.16 1800.2,947.4 v1(1800.2,967.04)
  Bottom Layer w6: P8.5 433.13,1152.36 447.63,1137.86 447.63,978.6 465.2,961.04 1170,961.04 1282.17,848.87 1417.29,848.87 1464.2,895.77 1678.93,895.77 1750.2,967.04 v1(1800.2,967.04)
PB3: U6_1.55 U7.6 | length 1065.5
  Top Layer w6: U7.6 964.2,960.92 v1(992.79,989.52) ; v1(1100,1000) 1104.23,1000 1115.2,989.04 1193.54,989.04 1216.2,966.38 1216.2,716.04 v1(1287.2,645.04) ; U6_1.55 v1(1550.47,646.73)
  Bottom Layer w6: v1(992.79,989.52) 1003.27,1000 v1(1100,1000) ; v1(1287.2,645.04) 1297.2,655.04 1542.17,655.04 v1(1550.47,646.73)
PB4: U6_1.56 U7.2 | length 1526.3
  Top Layer w6: v1(1065.08,890.92) 1105.2,890.92 1125.2,910.92 U7.2 ; v1(1567.93,389.47) 1567.93,579.03 U6_1.56
  Bottom Layer w6: v1(1065.08,890.92) 1065.08,620.92 954.2,510.04 954.2,480.04 965.2,469.04 982.2,469.04 1010.2,497.04 1266.37,497.04 1314.37,545.04 1515,545.04 1567.93,492.11 v1(1567.93,389.47)
PB5: U6_1.57 U7.5 | length 1566.1
  Top Layer w6: U7.5 1035.59,1010.92 1091.2,955.31 v1(1091.2,917.04) ; U6_1.57 v1(1589.84,693.04)
  Bottom Layer w6: v1(1091.2,917.04) 1091.2,573.04 1119.2,545.04 1205.2,545.04 1212.2,552.04 1212.2,669.04 1234.34,691.18 1322.34,691.18 1404.2,773.04 1451.4,773.04 1511.4,833.04 1568.69,833.04 1589.84,811.88 v1(1589.84,693.04)
PB6: P10.8 U6_1.58 | length 2320
  Top Layer w6: U6_1.58 1609.53,353.6 1643.13,320 v1(2246.09,320) ; P10.8 2837.78,1117.02 v1(2837.78,756.6)
  Bottom Layer w6: v1(2246.09,320) 2793.32,320 2837.78,364.47 v1(2837.78,756.6)
PB7: P10.10 U6_1.59 | length 2231.3
  Top Layer w6: U6_1.59 1629.21,389.47 1677.11,341.57 v1(2167.2,341.57) ; P10.10 2825.78,1029.02 2825.78,903.93 2753.2,831.35 v1(2753.2,725.04)
  Bottom Layer w6: v1(2167.2,341.57) 2709.77,341.57 2753.2,385 v1(2753.2,725.04)
PB8: P10.12 U6_1.61 | length 1485
  Top Layer w6: U6_1.61 1668.58,688.42 v1(1678.58,698.42)
  Bottom Layer w6: v1(1678.58,698.42) 1675.07,701.94 1675.07,734.76 1639.2,770.63 1639.2,801.82 1659.41,822.04 1771.75,822.04 1779.75,814.04 1914.2,814.04 1980.2,880.04 2529.47,880.04 2581.81,932.38 P10.12
PB9: P10.14 U6_1.62 | length 1592.6
  Top Layer w6: v1(1688.27,451.95) U6_1.62 ; v1(2002.02,368.04) 2128.2,368.04 2340,579.84 v1(2340,978.04)
  Bottom Layer w6: v1(1688.27,451.95) 1688.27,393.33 1713.56,368.04 v1(2002.02,368.04) ; v1(2340,978.04) 2344.91,978.04 2481.81,1114.93 P10.14
PC0: P10.1 U6_1.8 | length 1654.1
  Top Layer w6: v1(1745.2,789.92) U6_1.8
  Bottom Layer w6: v1(1745.2,789.92) 1929.51,789.92 1990.63,851.04 2611.71,851.04 2871.71,1111.04 3029.2,1111.04 3031.2,1113.04 3031.2,1222.39 P10.1
PC3: P10.3 U6_1.11 | length 1417.7
  Top Layer w6: U6_1.11 v1(1864.2,848.97)
  Bottom Layer w6: v1(1864.2,848.97) 1871.96,848.97 1968.02,945.04 2226.2,945.04 2443.28,1162.12 2443.28,1189.61 2465.2,1211.53 2782.25,1211.53 2831.2,1260.47 2831.2,1278.04 2865.2,1312.04 2942.77,1312.04 P10.3
PC4: P10.5 U6_1.24 | length 1911.9
  Top Layer w6: U6_1.24 1590.2,1070.04 v1(1590.2,1149.04)
  Bottom Layer w6: v1(1590.2,1149.04) 1590.53,1148.71 2023.01,1148.71 2221.83,1347.53 2989.71,1347.53 3043.2,1294.04 3043.2,1257.47 3020.2,1234.47 2920.33,1234.47 P10.5
PC5: P10.7 U6_1.25 | length 1411
  Top Layer w6: U6_1.25 v1(1570.2,1090.04) v1(1570.2,1090.04)
  Bottom Layer w6: v1(1570.2,1090.04) 1609.2,1129.04 2023.64,1129.04 2230.13,1335.53 2719.28,1335.53 P10.7
PC6: P10.9 U6_1.37 | length 1980.6
  Top Layer w6: U6_1.37 1294.57,868.66 1270.2,893.04 1270.2,1007.04 1357.2,1094.04 1357.2,1113.04 1371.2,1127.04 1390.2,1127.04 1404.2,1113.04 v1(1404.2,1030.04)
  Bottom Layer w6: v1(1404.2,1030.04) 1469.63,964.61 1469.63,944.2 1494.06,919.77 1584.76,919.77 1684.03,1019.04 2045.95,1019.04 2243.2,1216.28 2452.98,1216.28 2470.73,1234.04 2642.84,1234.04 P10.9
PC7: P10.11 U6_1.38 | length 1776.9
  Top Layer w6: U6_1.38 1456.13,848.97 1464.2,857.04 1464.2,923.04 1446.58,940.65 1432.58,940.65 1405.11,968.12 1381.11,968.12 1366.2,983.04 1366.2,1012.6 1381.2,1027.6 v1(1381.2,1107.04)
  Bottom Layer w6: v1(1381.2,1107.04) 1430.2,1058.04 1587.69,1058.04 1617.69,1088.04 2019.2,1088.04 2254.69,1323.53 2531.28,1323.53 P10.11
PC8: P10.13 U6_1.39 | length 1304.1
  Top Layer w6: U6_1.39 1457.45,829.29 v1(1589.2,961.04)
  Bottom Layer w6: v1(1589.2,961.04) 1659.2,1031.04 2021.2,1031.04 2224.2,1234.04 2442.84,1234.04 P10.13
PC9: P10.15 U6_1.40 | length 1718.7
  Top Layer w6: U6_1.40 1408.63,809.6 v1(1480,738.23) ; v1(1987.48,643.33) 1987.48,727.75 1953.2,762.04 1953.2,918.04 2008.2,973.04 2144.2,973.04 2164.2,993.04 2164.2,1210.53 2265.2,1311.53 2343.28,1311.53 P10.15
  Bottom Layer w6: v1(1480,738.23) 1494.29,738.23 1578.91,653.61 1806.85,653.61 1817.14,643.33 v1(1987.48,643.33)
PC10: P10.17 U6_1.51 | length 1529.3
  Top Layer w6: U6_1.51 1471.73,632.57 v1(1472.2,633.04) ; v1(2010.58,587.97) 2011.2,588.59 2011.2,793.04 1973.2,831.04 1973.2,918.04 2011.2,956.04 2167.2,956.04 2204.2,993.04 2204.2,1195.39 P10.17
  Bottom Layer w6: v1(1472.2,633.04) 1517.26,587.97 v1(2010.58,587.97)
PC11: P10.2 U6_1.52 | length 2628.7
  Top Layer w6: U6_1.52 1491.42,325.39 1536.81,280 v1(2161.21,280)
  Bottom Layer w6: v1(2161.21,280) 2861.01,280 3081.81,500.8 P10.2
PC12: P10.4 U6_1.53 | length 1770.3
  Top Layer w6: U6_1.53 1511.1,662.94 1622.17,774.02 v1(1665.63,774.02)
  Bottom Layer w6: v1(1665.63,774.02) 1699.17,774.02 1735.2,810.04 1766.78,810.04 1774.78,802.04 1921.03,802.04 1987.03,868.04 2595.68,868.04 2851.31,1123.67 2932.48,1123.67 P10.4
PC13: P10.6 U6_1.2 | length 1751.1
  Top Layer w6: v1(1724.2,687.04) 1739.42,671.81 U6_1.2 ; v1(2881.81,1042.04) P10.6
  Bottom Layer w6: v1(1724.2,687.04) 1823.2,687.04 1838.74,671.49 1891.46,671.49 1901.75,681.78 2273.45,681.78 2378.7,576.53 2584.69,576.53 2634.2,626.04 2634.2,856.23 2820,1042.04 v1(2881.81,1042.04)
PD2: P10.16 U6_1.54 | length 2184.9
  Top Layer w6: U6_1.54 1530.79,331.61 1562.4,300 2331.09,300 2369.2,338.11 2369.2,1015.72 2243.2,1141.72 2243.2,1190.04 2265.2,1212.04 2342.77,1212.04 P10.16
remote3: P9.2 U6_1.17 | length 3055.9
  Top Layer w6: U6_1.17 1732.87,1013.04 2059.2,1013.04 2079.2,1033.04 v1(2079.2,1457.04)
  Bottom Layer w6: P9.2 129.13,1902.04 901,1902.04 941.2,1861.84 941.2,1750.04 965.2,1726.04 1029.2,1726.04 1298.2,1457.04 v1(2079.2,1457.04)
remote4: P9.5 U6_1.22 | length 2099.3
  Top Layer w6: v1(1619.21,1109.04) 1629.21,1099.04 U6_1.22
  Bottom Layer w6: P9.5 319.13,1792.04 745.2,1792.04 997.2,1540.04 997.2,1454.04 1111.2,1340.04 1290.2,1340.04 1560.2,1070.04 1580.21,1070.04 v1(1619.21,1109.04)
RES#: C27.1 D2.2 P3.5 R18.1 U6_1.26 U8.14 | length 4024
  Top Layer w6: v1(1527.84,1727.04) 1652.5,1851.7 1679.9,1853.53 P3.5 ; U6_1.26 1550.47,1059.76 1540.2,1070.04 1540.2,1097.79 1552.44,1110.04 R18.1 1919.2,1184.96 2022.2,1287.96 2022.2,1913.96 P3.5 ; C27.1 2190.2,1719.24 ; D2.2 2178.58,1707.63 2190.2,1719.24 ; P3.5 1751.68,2328.04 2262.45,2328.04 2295.2,2295.29 2295.2,1999.04 2285.2,1989.04 2145.2,1989.04 2139.73,1983.57 2139.73,1933.04 2196.2,1876.57 2196.2,1725.24 2190.2,1719.24
  Bottom Layer w6: v1(1527.84,1727.04) U8.14
RESET: C11.2 R4.2 RESET.1 U6_1.7 | length 2760.2
  Top Layer w6: C11.2 1160.71,234.53 1160.22,234.04 R4.2 1140.2,137.12 1131.2,128.12 1131.2,53.04 1142.2,42.04 2002.02,42.04 RESET.1 2258.52,167.92 2381.81,291.2 2381.81,627.35 2416.81,662.36 v1(2416.81,736.22) ; U6_1.7 1845,770.23 v1(1864.2,751.04)
  Bottom Layer w6: v1(1864.2,751.04) 1886.2,729.04 1947.2,729.04 1954.38,736.22 v1(2416.81,736.22)
SPI2_MISO: P7.6 U6_1.35 | length 787.8
  Top Layer w6: v1(773.39,1155.04) P7.6 ; v1(1302.26,908.03) U6_1.35
  Bottom Layer w6: v1(773.39,1155.04) 828.39,1100.04 1068.2,1100.04 1241.39,926.84 1283.45,926.84 v1(1302.26,908.03)
SPI2_MOSI: P7.5 U6_1.36 | length 1568.4
  Top Layer w6: P7.5 v1(723.39,1558.03) ; U6_1.36 1421.89,888.34 v1(1444.2,910.65)
  Bottom Layer w6: v1(723.39,1558.03) 723.39,1270.04 865.38,1128.04 1107.2,1128.04 1250.2,985.04 1325.41,985.04 1351.85,958.6 1418.7,958.6 1444.2,933.11 v1(1444.2,910.65)
SPI2_SCK: P7.4 U6_1.34 | length 1098.9
  Top Layer w6: v1(673.39,1157.04) P7.4 ; U6_1.34 v1(1414.2,927.71)
  Bottom Layer w6: v1(673.39,1157.04) 673.39,1032.54 686.89,1019.04 1090.75,1019.04 1091.72,1020 1129.28,1020 1271.45,877.83 1364.31,877.83 v1(1414.2,927.71)
SWCLK: P4.6 P5.4 U6_1.49 | length 2876.4
  Top Layer w6: P4.6 348.78,1061.18 P5.4 ; v1(1427.2,480.04) 1432.36,485.2 U6_1.49
  Bottom Layer w6: P5.4 318.28,1013.04 48.2,1013.04 28.2,993.04 28.2,673.04 50.2,651.04 397.2,651.04 745.83,302.4 1367.6,302.4 1427.2,362 v1(1427.2,480.04)
SWDIO: P4.5 P5.3 U6_1.46 | length 2086.6
  Top Layer w6: P4.5 397.2,1504.11 397.2,991.95 P5.3 ; v1(1332.2,520) 1332.2,562.87 1407.2,637.87 1407.2,684.49 U6_1.46
  Bottom Layer w6: P5.3 373.57,952.36 816.89,509.04 817.58,509.04 869.58,457.04 999.2,457.04 1026.2,484.04 1300.2,484.04 1332.2,516.04 v1(1332.2,520)
USART1_RXD: P4.4 U6_1.43 | length 1901
  Top Layer w6: P4.4 307.6,1611.34 307.6,939.24 335.92,910.92 v1(465.2,910.92) ; v1(1252.2,761.04) 1262.68,750.55 U6_1.43
  Bottom Layer w6: v1(465.2,910.92) 491.31,937.04 1105.2,937.04 1252.2,790.04 v1(1252.2,761.04)
USART1_TXD: P4.3 U6_1.42 | length 1879.6
  Top Layer w6: v1(1258.18,1193.05) 1258.18,794.27 1282.21,770.23 U6_1.42
  Bottom Layer w6: P4.3 745.2,1752.52 765.2,1732.52 765.2,1346.04 859.2,1252.04 1199.2,1252.04 v1(1258.18,1193.05)
VBAT: C1.2 C3.2 P1.2 R7.1 U2.3 USB1.1 | length 1751.7
  Top Layer w8: P1.2 375.65,391.91 ; USB1.1 464.02,303.54 375.65,391.91 ; R7.1 623.58,392.9 C3.2 C1.2 375.65,391.91 ; U2.3 v2(1130.24,261.85)
  Bottom Layer w8: P1.2 505.71,261.85 v2(1130.24,261.85)
VCC3.3: BOOT1.1 BOOT1.2 BUZZER1.1 C2.2 C4.2 C5.2 C6.2 C7.2 C8.2 C9.2 C10.2 C16.2 C25.1 C26.1 D1.1 D2.1 P3.2 P4.2 P5.2 P7.1 P8.3 P8.6 P9.3 P9.6 R1.2 R2.2 R3.2 R4.1 R9.1 R13.1 R16.1 R17.1 R18.2 U2.2 U2.4 U6_1.1 U6_1.13 U6_1.19 U6_1.32 U6_1.48 U6_1.64 U7.3 U7.7 U7.8 U8.6 U8.9 WKUP.2 | length 17039.8
  Top Layer w8: P8.3 39.2,992.77 39.2,1211.95 P8.6 P9.6 39.2,1492.93 39.2,1712.11 P9.3 ; P5.2 489.2,852.36 ; 489.2,852.36 R9.1 622.78,930.04 622.09,930.73 C16.2 622.09,1110.04 ; C2.2 556.59,641.25 ; P7.1 523.39,1121.46 534.81,1110.04 622.09,1110.04 ; v2(571.2,669.04) 571.2,655.86 556.59,641.25 ; v2(865.53,1803.7) 971.2,1803.7 ; U7.8 867.2,860.92 U7.7@867.2,910.92 ; U7.7 U7.7@867.2,910.92 ; v2(971.2,1767.04) 971.2,1803.7 ; R13.1 971.2,1803.7 ; U2.2 U2.4 800.2,242.04 833.2,275.04 833.2,663.07 R1.2 ; R4.1 1185.2,76.43 1190.2,81.43 1190.2,358.04 1185.2,363.04 1022.2,363.04 1017.2,368.04 1017.2,574.04 913.67,677.57 R2.2 R1.2 ; R16.1 1399.27,1184.96 ; U6_1.48 1331.2,652.12 1303.12,624.04 1195.22,624.04 1160.22,659.04 R3.2 1160.22,731.04 1203.2,774.02 1203.2,953.38 1195.66,960.92 U7.3 1105.2,960.92 1079,987.12 1079,1024.84 1093.2,1039.04 ; U6_1.32 1432.36,1097.04 1440.69,1105.36 R17.1 ; R18.2 1526.89,1245.65 1466.2,1184.96 R17.1 ; v2(1688.27,941.04) U6_1.19 ; U6_1.64 1727.64,616.04 1730.2,616.04 1730.2,637.12 1745.2,652.12 U6_1.1 1890.28,652.12 1920.2,682.04 1920.2,853.34 ; U6_1.13 1885.2,888.34 1893.57,879.97 ; v2(1899.2,988.04) 1919.2,968.04 1919.2,893.04 1906.13,879.97 1893.57,879.97 ; C25.1 C26.1 2275.7,1951.28 2275.7,1793.04 ; C8.2 2732.23,1480.44 C5.2 2732.23,1663.04 ; WKUP.2 2781.2,188.01 2781.2,534.82 2728.04,587.97 2728.04,902.93 BUZZER1.1 2710.2,952.3 D1.1 2685.2,1082.04 2634.2,1133.04 2634.2,1346.04 2619.2,1361.04 2619.2,1663.04 2629.2,1673.04 2722.23,1673.04 2732.23,1663.04 ; BOOT1.2 BOOT1.1 ; C7.2 C10.2 3100.32,1425.16 3095.2,1420.04 3008.52,1420.04 2976.2,1452.36 C9.2 C6.2 2930.46,1782.64 BOOT1.1 ; 556.59,641.25 C4.2 622.1,519.13 645.2,496.04 745.2,496.04 772.2,523.04 772.2,666.7 R1.2 ; 622.09,1110.04 732.2,1110.04 819.2,1023.04 ; 819.2,1023.04 819.2,923.04 831.31,910.92 U7.7@867.2,910.92 ; 819.2,1023.04 835.2,1039.04 1093.2,1039.04 ; 1093.2,1039.04 1142.2,1088.04 1142.2,1194.04 1165.2,1217.04 1245.2,1217.04 1302.2,1274.04 1360.2,1274.04 1371.2,1263.04 1371.2,1213.04 1399.27,1184.96 ; 1399.27,1184.96 R17.1 ; 1893.57,879.97 1920.2,853.34 ; 1920.2,853.34 1920.2,967.04 1946.2,993.04 2129.2,993.04 2149.2,1013.04 2149.2,1277.92 2310.2,1438.92 2310.2,1722.54 2275.7,1757.04 D2.1 2275.7,1793.04 ; 2275.7,1793.04 2301.7,1819.04 2728.2,1819.04 2734.2,1813.04 2734.2,1665.28 ; 2732.23,1663.04 2734.2,1665.28 ; 2732.23,1663.04 2734.2,1665.01 2734.2,1665.28 ; 2734.2,1665.28 BOOT1.1
  Bottom Layer w8: P8.3 257.6,952.36 P5.2 405.87,852.36 571.2,687.04 v2(571.2,669.04) ; P9.3 248.78,1752.52 P4.2 816.72,1852.52 v2(865.53,1803.7) ; v2(971.2,1767.04) 971.2,1865.04 1017.2,1911.04 1285.2,1911.04 1307.37,1888.87 1307.37,1863.04 ; U8.6 1307.37,1863.04 ; U8.9 1390.04,1863.04 1380.04,1873.04 ; v2(1688.27,941.04) 1735.27,988.04 v2(1899.2,988.04) ; BOOT1.2 2871.55,1932.36 2485.88,2318.04 1441.88,2318.04 P3.2 1380,1873.08 1380.04,1873.04 ; 1307.37,1863.04 1317.37,1873.04 1380.04,1873.04
WKUP: U6_1.14 WKUP.1 | length 1473.1
  Top Layer w6: U6_1.14 v1(1898.19,908.03) ; v1(1941.2,951.04) 1941.2,485.39 1979.56,447.03 v1(2144.2,447.03) ; v1(2470.73,447.03) 2470.73,222.06 WKUP.1
  Bottom Layer w6: v1(1898.19,908.03) v1(1941.2,951.04) ; v1(2144.2,447.03) v1(2470.73,447.03)
pads on no net: BUZZER1.3 BUZZER1.4 U8.7 USB1. USB1.2 USB1.3 USB1.4 USB1.6
copper on no net: | length 130.7
  Top Layer w6: v1(489.61,150.67) 489.61,194.22 ; 515.2,194.22 v1(515.2,237.78) ; v1(540.79,150.67) 540.79,194.22

## Polygon pours and split planes (outlines as drawn)
no net on Top Layer "Top Layer-No Net" (solid, pour order 28): 314.96,2374.57 314.96,2086.61 5.2,2086.61 5.2,314.96 314.96,314.96 314.96,12.36 2834.65,12.36 2834.65,314.96 3154.8,314.96 3154.8,2047.24 2834.65,2047.24 2834.65,2374.57
no net on Top Layer "Top Layer-No Net 1" (solid, pour order 22): 325.2,2374.57
no net on Top Layer "Top Layer-No Net 2" (solid, pour order 8): 595.75,2393.04
no net on Bottom Layer "Bottom Layer-No Net" (solid, pour order 30): 314.96,2374.57 314.96,2086.61 5.2,2086.61 5.2,314.96 314.96,314.96 314.96,12.36 2834.65,12.36 2834.65,314.96 3154.8,314.96 3154.8,2047.24 2834.65,2047.24 2834.65,2374.57

## Silkscreen, mask and mechanical layers (free items; w line width, h text height)
Top Overlay:
  text "GND" at 156.64,1956.78 h30
  text "PA3" at 156.64,1845.83 h30
  text "VCC" at 156.64,1734.87 h30
  text "GND" at 156.64,1623.92 h30
  text "PA6" at 156.64,1512.97 h30
  text "VCC" at 156.64,1402.02 h30
  text "VCC" at 156.64,1263.42 h30
  text "PA2" at 156.64,1152.47 h30
  text "GND" at 156.64,1041.52 h30
  text "VCC" at 156.64,930.57 h30
  text "-" at 2705.2,851.63 h45
  text "PA1" at 156.64,819.61 h30
  text "GND" at 156.64,708.66 h30
Bottom Overlay:
  lines w6: 307.6,1102.36 307.6,702.36 312.97,697 993,697 993.38,697.38 993.38,1104.23 994,1104.85 406.74,1104.85 405.93,1104.04 309.2,1104.04 ; 398.78,1402.52 398.78,2002.52 ; 407.6,697.4 407.6,1102.36 ; 2231.81,895.54 2231.81,1124 ; 3127.7,1323 2231.81,1323 ; 398.78,2002.52 298.78,2002.52 298.78,1402.52 303.35,1397.95 994.52,1397.95 994.52,2002.52 398.78,2002.52 ; 2231.81,893.27 2231.81,893.27 ; 2231.81,893.27 2231.81,893.27 ; 2231.81,893.27 3131,893.27 3131.81,894.08 3131.81,1123 ; 2231.81,1323 2231.81,1561.19 3131.81,1561.19 3131.81,1483.86 3131.81,1318.9 3131.81,1123 ; 2231.81,1323 2231.81,1123 3131.81,1123
  text "-" at 3064.65,2036.38 h60 r180
  text "+" at 2892.6,1996.38 h60
  text "1" at 3003.63,1996.38 h60
  text "GND" at 996.13,1937.52 h90
  text "VCC" at 996.13,1829.52 h90
  text "USART1_TXD" at 996.13,1721.52 h90
  text "+" at 2892.6,1719.24 h60
  text "0" at 3003.63,1719.24 h60
  text "-" at 3114.65,1719.24 h60
  text "USART1_RXD" at 996.13,1613.52 h90
  text "SWD" at 996.13,1505.52 h90
  text "SWC" at 994.95,1397.52 h90
  text "PC10" at 2227.87,1362.9 h90 r270
  text "PC9" at 2332.6,1362.9 h90 r270
  text "PC8" at 2437.34,1362.9 h90 r270
  text "PC7" at 2542.07,1362.9 h90 r270
  text "PC6" at 2646.81,1362.9 h90 r270
  text "PC5" at 2751.54,1362.9 h90 r270
  text "PC4" at 2856.27,1362.9 h90 r270
  text "PC3" at 2961.01,1362.9 h90 r270
  text "PC0" at 3065.74,1362.9 h90 r270
  text "SWC" at 996.13,1037.36 h90
  text "SWD" at 996.13,924.03 h90
  text "PA8" at 2227.87,893.27 h90 r270
  text "PD2" at 2332.6,893.27 h90 r270
  text "PB9" at 2437.34,893.27 h90 r270
  text "PB8" at 2542.07,893.27 h90 r270
  text "PB7" at 2646.81,893.27 h90 r270
  text "PB6" at 2751.54,893.27 h90 r270
  text "PC13" at 2856.27,893.27 h90 r270
  text "PC12" at 2961.01,893.27 h90 r270
  text "PC11" at 3065.74,893.27 h90 r270
  text "VCC" at 996.13,810.7 h90
  text "GND" at 996.13,697.36 h90
  text "2020.5.21 revised version" at 3135.74,354.33 h100
Mechanical 1:
  lines w6: 1119.37,1382.44 1119.37,1406.06 1123.31,1410 2009.25,1410 2013.07,1406.18 2013.07,1382.44 2009.13,1378.5 1123.31,1378.5 1119.37,1382.44
  lines w10: 3154.8,2217.09 ccw(c2997.26,2217.03) 2997.2,2374.57 163.19,2374.57 ccw(c162.93,2216.83) 5.2,2217.09 5.2,169.37 ccw(c162.44,169.61) 162.68,12.36 2997.2,12.36 ccw(c2997.29,169.87) 3154.8,169.78 3154.8,2222.36

## Text inside footprints (layer, text, board x,y; h text height)
P3: Top Overlay "0.96'OLED" at 1491.42,1930.38 h30; Top Overlay "GND" at 1304.28,2098.96 h30 r90; Top Overlay "VCC" at 1402.78,2098.96 h30 r90; Top Overlay "D0" at 1501.18,2128.36 h30 r90; Top Overlay "DC" at 1806.28,2128.36 h30 r90; Top Overlay "D1" at 1604.58,2146.26 h30 r90; Top Overlay "RES" at 1707.88,2098.96 h30 r90; Top Overlay "CS" at 1904.68,2128.36 h30 r90